# Altium PCB lock_in_amplifier.PcbDoc
Units mil, origin at the board's own origin, x right, y up, seen from the top; angles counter-clockwise.
Board outline 2205 x 2223 mil, 2 copper layers (Top Layer, Bottom Layer); 50 components, 36 nets, 177 pads, 217 vias.
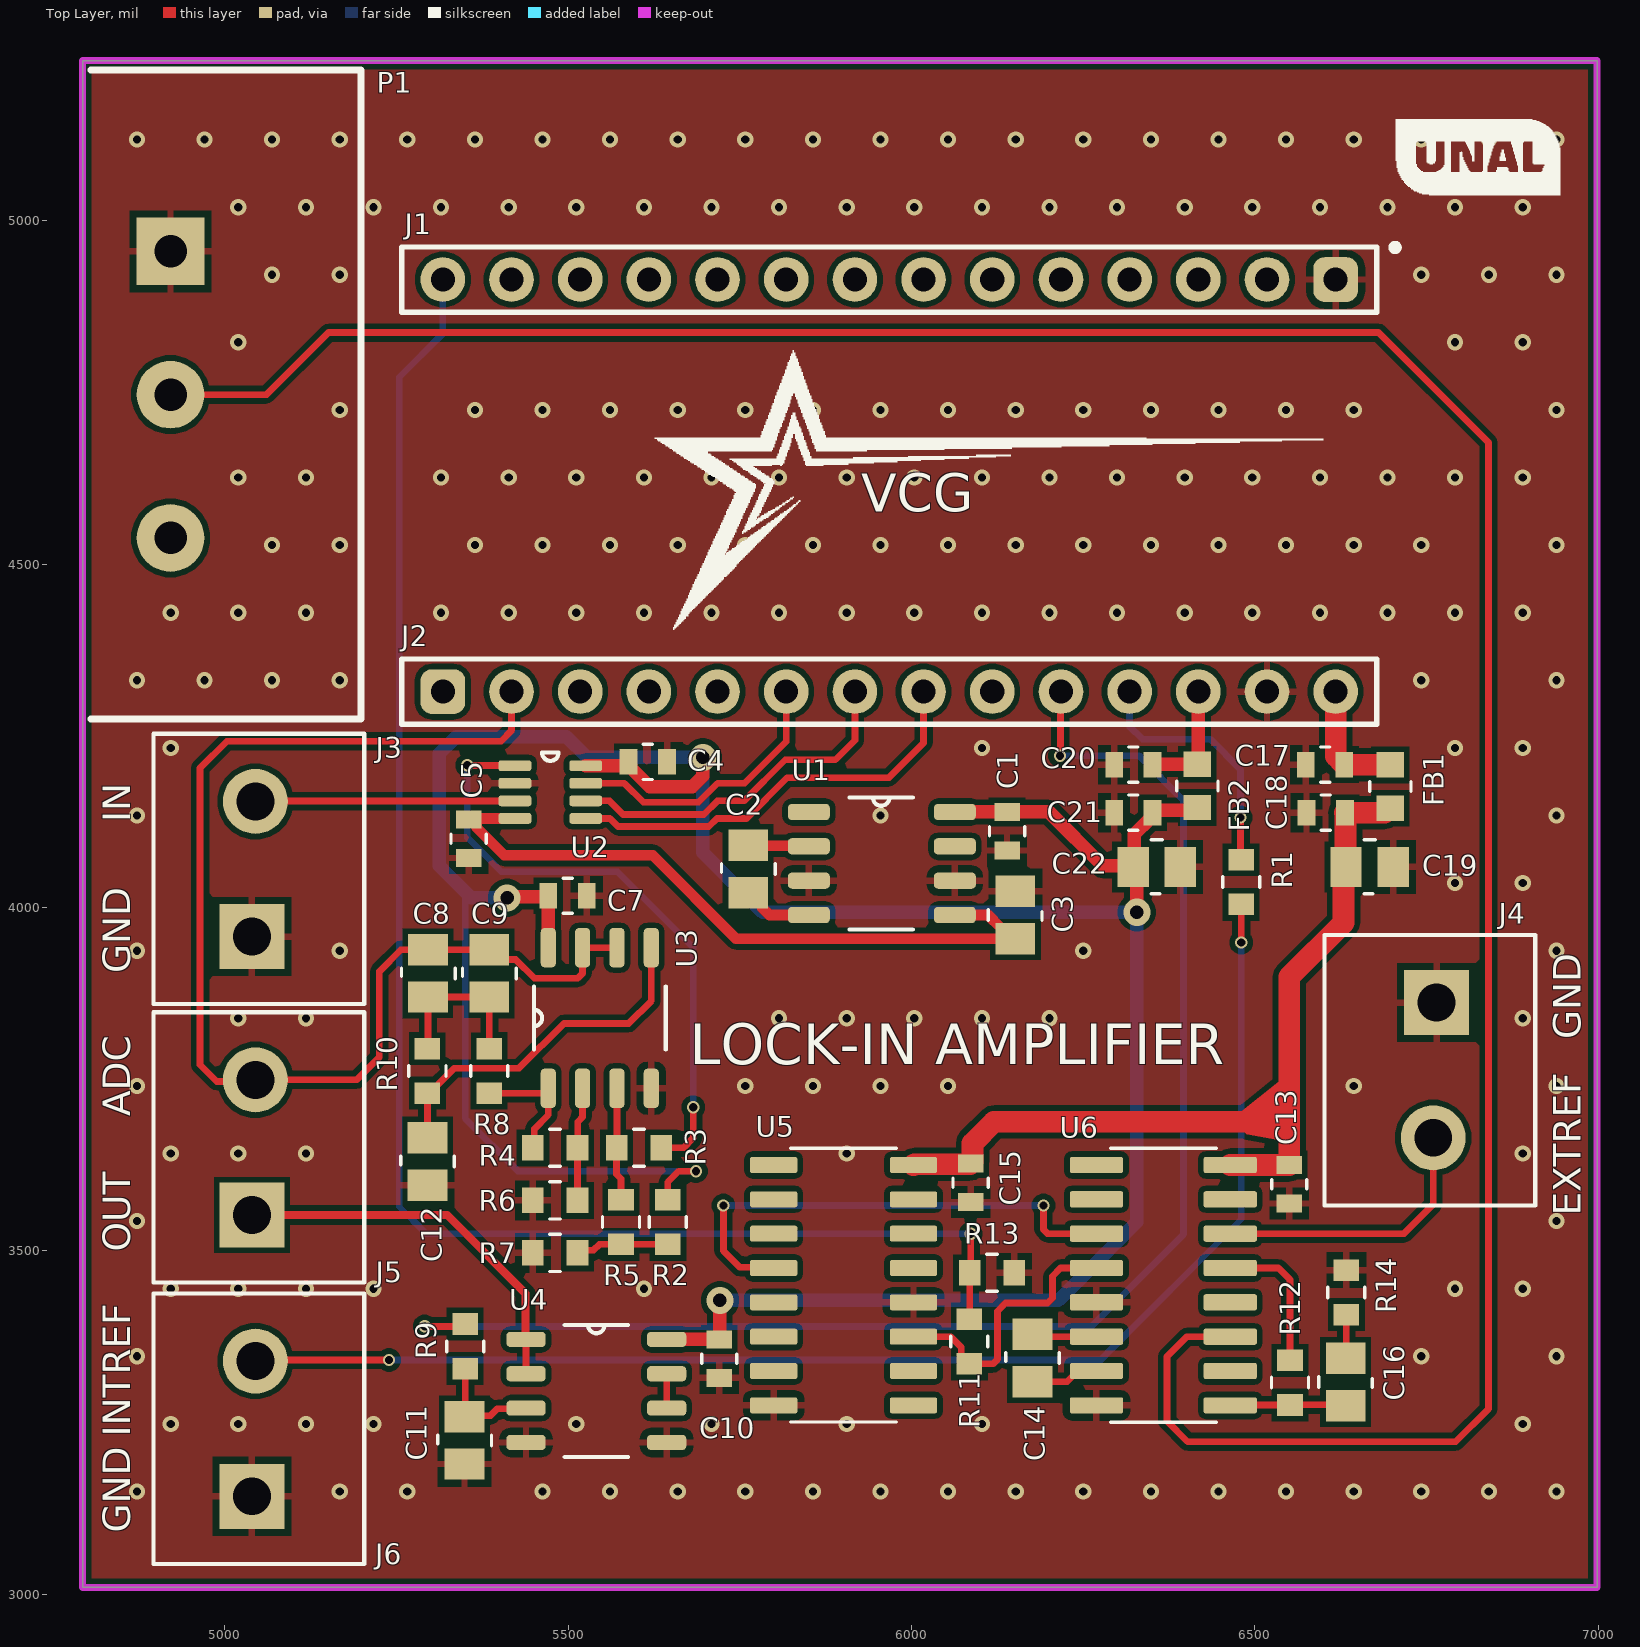
[diagram p0: Top Layer view]
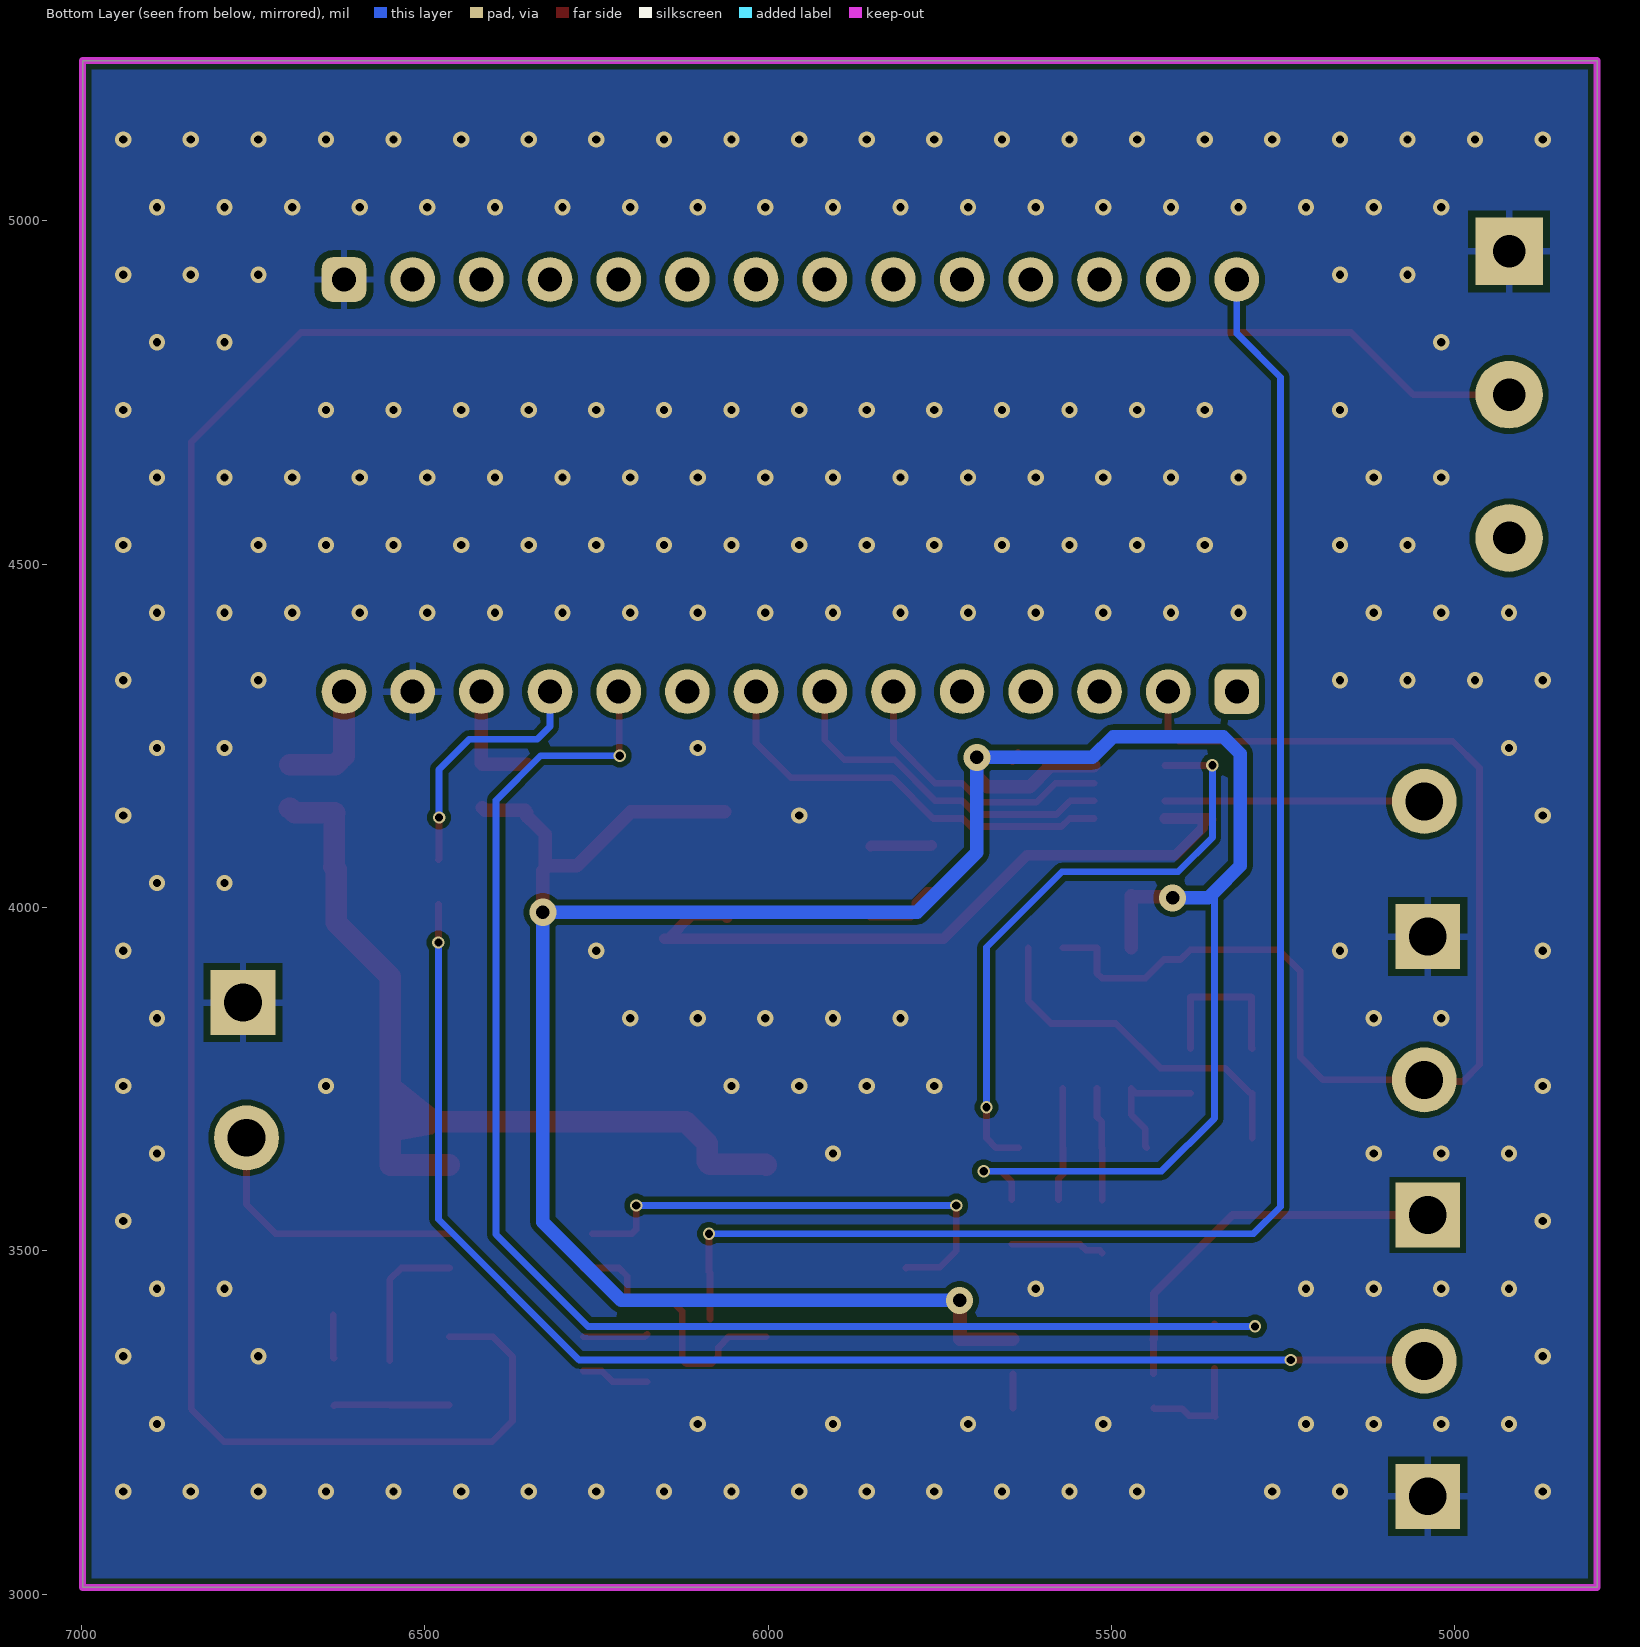
[diagram p1: Bottom Layer view, seen from below]
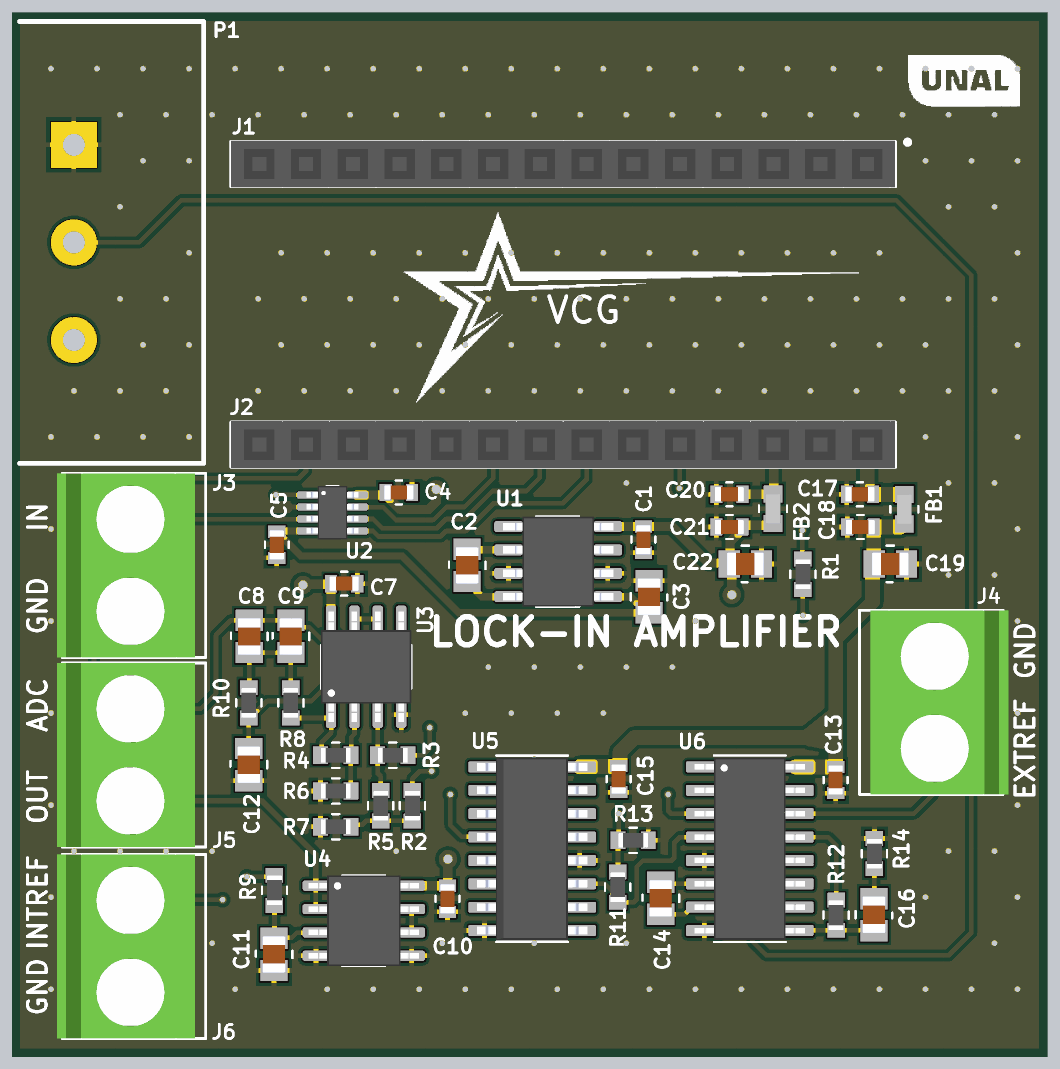
[diagram p2: 3D render of the assembled board from above, using the file's embedded part models]

## Layer stack, top to bottom
Top Solder: solder mask 0.4, Solder Resist, Dk 3.5
Top Layer: signal copper 1.4
Dielectric 1: dielectric 12.6, FR-4, Dk 4.8
Bottom Layer: signal copper 1.4
Bottom Solder: solder mask 0.4, Solder Resist, Dk 3.5

## Board outline
4793,3010 4793,5233 6998,5233 6998,3010

## Design rules (kind name [scope] priority, off if disabled: settings)
AcuteAngle [All] p1: minimum=6.00000000000000E+0001 checktracksonly=FALSE
Clearance [All] p1: gap=7.87 ignorepadtopadclearanceinfootprint=FALSE
HoleSize [All] p1: absolutevalues=TRUE maxlimit=100 minlimit=12 maxpercent=80.000 minpercent=20.000
MinimumSolderMaskSliver [All] p1: minsoldermaskwidth=4.72
PolygonConnect via [isvia] p1: connectstyle=Direct reliefconductorwidth=10 reliefentries=4 polygonreliefangle="90 Angle" airgapwidth=10
PolygonConnect [All] p2: connectstyle=Relief reliefconductorwidth=10 reliefentries=4 polygonreliefangle="90 Angle" airgapwidth=10
RoutingVias [All] p1: holewidth=12 width=18 viastyle="Through Hole" minholewidth=11.81 minwidth=18 maxholewidth=19.68 maxwidth=39.37
SilkToSolderMaskClearance [IsPad] p1: minsilkscreentomaskgap=5.91 clearancetoexposedcopper=TRUE
SolderMaskExpansion [All] p1: expansion=2 istentingtop=FALSE
SupplyNets "Schematic Supply Nets_4" [InNet('3V3')] p1: voltage=0.000
SupplyNets "Schematic Supply Nets_3" [InNet('5V_USB')] p2: voltage=0.000
SupplyNets "Schematic Supply Nets_2" [InNet('GND')] p3: voltage=0.000
SupplyNets "Schematic Supply Nets_1" [InNet('3V3TEENSY')] p4: voltage=0.000
SupplyNets "Schematic Supply Nets" [InNet('5V')] p5: voltage=0.000
Width [All] p1: maxlimit=39.37 minlimit=7.87 preferedwidth=9.84
27 further rules are at their usual default settings.

## Classes and differential pairs
component class POWER: C17 C18 C19 C20 C21 C22 FB1 FB2 J3 J4 J5 J6
component class MAIN: C1 C2 C3 C4 C5 C7 C8 C9 C10 C11 C12 C13 C14 C15 C16 J1 J2 P1 R1 R2 R3 R4 R5 R6 R7 R8 R9 R10 R11 R12 R13 R14 U1 U2 U3 U4 U5 U6

## Components (designator, comment, footprint, x,y, rotation, side; value= is the part's Value field where it differs from the comment)
C1 "CAP_100nF_50V" CAP_0603 6139,4111 r90 top value=0.1uF
C2 "CAP_10uF_16V" CAP_0805 5762,4056 r90 top value=10uF
C3 "CAP_10uF_16V" CAP_0805 6151,3989 r270 top value=10uF
C4 "CAP_100nF_50V" CAP_0603 5616,4212 r180 top value=0.1uF
C5 "CAP_100nF_50V" CAP_0603 5355,4100 r90 top value=0.1uF
C7 "CAP_100nF_50V" CAP_0603 5499,4017 r180 top value=0.1uF
C8 "CAP_100pF_25V" CAP_0805 5296,3904 r90 top value=100pF
C9 "CAP_100pF_25V" CAP_0805 5385,3904 r90 top value=100pF
C10 "CAP_100nF_50V" CAP_0603 5720,3343 r90 top value=0.1uF
C11 "CAP_10uF_16V" CAP_0805 5349,3224 r90 top value=10uF
C12 "CAP_100pF_25V" CAP_0805 5295,3630 r90 top value=100pF
C13 "CAP_100nF_50V" CAP_0603 6550,3597 r90 top value=0.1uF
C14 "CAP_820pF_25V" CAP_0805 6176,3344 r90 top value=820pF
C15 "CAP_100nF_50V" CAP_0603 6086,3599 r90 top value=0.1uF
C16 "CAP_1.5uF_16V" CAP_0805 6632,3309 r270 top value=1.5uF
C17 "CAP_100nF_50V" CAP_0603 6602,4208 r0 top value=0.1uF
C18 "CAP_100nF_50V" CAP_0603 6603,4138 r0 top value=0.1uF
C19 "CAP_10uF_16V" CAP_0805 6667,4059 r180 top value=10uF
C20 "CAP_100nF_50V" CAP_0603 6323,4208 r0 top value=0.1uF
C21 "CAP_100nF_50V" CAP_0603 6323,4138 r0 top value=0.1uF
C22 "CAP_10uF_16V" CAP_0805 6357,4059 r180 top value=10uF
FB1 "FB_60_0603_2A" 0603_FB 6697,4176 r270 top value="60 OHM"
FB2 "FB_60_0603_2A" 0603_FB 6416,4177 r270 top value="60 OHM"
J1 "SSW-114-01-X-S" SAMTEC_SSW-114-01-X-S 5967.47,4914.26 r180 top locked
J2 "SSW-114-01-X-S" SAMTEC_SSW-114-01-X-S 5967.47,4314.26 r0 top locked
J3 "CON_2x1_TH_5mm" CON_2x1_TH_5MM#1 5042,4056 r90 top
J4 "CON_2x1_TH_5mm" CON_2x1_TH_5MM#2 6762,3763 r270 top
J5 "CON_2x1_TH_5mm" CON_2x1_TH_5MM#2 5042,3650.57 r90 top
J6 "CON_2x1_TH_5mm" CON_2x1_TH_5MM#1 5042,3241 r90 top
P1 "POT_200K" POT_PDB181-K420K-204B 4921,4746.66 r270 top value=200K
R1 "RES_191R_0603" RES_0603 6480,4037 r90 top value=191R
R2 "RES_10K_0603" RES_0603 5645,3542 r90 top value=10K
R3 "RES_100K_0603" RES_0603 5603,3650 r180 top value=100K
R4 "RES_100K_0603" RES_0603 5481,3650 r180 top value=100K
R5 "RES_100K_0603" RES_0603 5577,3542 r270 top value=100K
R6 "RES_100K_0603" RES_0603 5481,3573.5 r0 top value=100K
R7 "RES_10K_0603" RES_0603 5481,3497 r0 top value=10K
R8 "RES_12K_0603" RES_0603 5385,3762 r90 top value=12K
R9 "RES_10K_0603" RES_0603 5350,3361 r270 top value=10K
R10 "RES_12K_0603" RES_0603 5295,3762 r90 top value=12K
R11 "RES_2K2_0603" RES_0603 6084,3368 r270 top value=2K2
R12 "RES_220K_0603" RES_0603 6551,3308 r90 top value=220K
R13 "RES_3K3_0603" RES_0603 6117,3468 r180 top value=3K3
R14 "RES_4K7_0603" RES_0603 6633,3439.48 r270 top value=4K7
U1 "IC_TC7660" IC_TC7660EOA 5956.7,4064 r0 top
U2 "IC_LTC6910-2" IC_LTC6910-2CTS8#TRMPBF 5474,4168 r0 top
U3 "IC_MCP602" IC_MCP602T-I/SN 5546,3839 r90 top
U4 "IC_MCP602" IC_MCP602T-I/SN 5541,3296 r0 top
U5 "IC_74HC4060D" IC_74HC4060D-Q100,118 5901,3450 r0 top
U6 "IC_CD74HC4046AM96" IC_CD74HC4046AM96 6366.56,3450 r0 top

## Footprints (in the part's own frame and the unit in brackets; to place one, negate y for a bottom-side part, rotate by r counter-clockwise, add the part's x,y. Pads: shape width x height; smd on the part's side, far side on the other; paste and mask are expansions set on the pad)
0603_FB [mil]
  rect 37x40 smd mask+4: 1(-31.5,0) 2(31.5,0)
  silkscreen extent -7,-30 7,30, body extent -32,-16 31,16, height 32
CAP_0603 [mil]
  rect 26x37 smd paste+0 mask+3.94: 1(-28,0) 2(28,0)
  silkscreen extent -7,-26 7,26, body extent -31,-16 31,16, height 34
CAP_0805 [mm]
  rect 1.16x1.47 smd paste+0 mask+0.1: 1(-0.875,0) 2(0.875,0)
  silkscreen extent -0.2,-1 0.2,0.99, body extent -1,-0.63 1,0.63, height 0.88
CON_2x1_TH_5MM#1 [mm]
  round 2.4 hole 1.4: 1(2.5,-0.063)
  rect 2.4x2.4 hole 1.4: 2(-2.5,0.063)
  silkscreen extent -5,-4.09 5,3.71, body extent -5,-3.5 5,4, height 11.5
CON_2x1_TH_5MM#2 [mm]
  rect 2.4x2.4 hole 1.4: 1(-2.5,0.063)
  round 2.4 hole 1.4: 2(2.5,-0.063)
  silkscreen extent -5,-4.09 5,3.71, body extent -5,-3.5 5,4, height 11.5
IC_74HC4060D-Q100,118 [mm]
  rrect25% 1.75x0.59 smd mask+0.1: 1(-2.585,4.445) 2(-2.585,3.175) 3(-2.585,1.905) 4(-2.585,0.635) 5(-2.585,-0.635) 6(-2.585,-1.905) 7(-2.585,-3.175) 8(-2.585,-4.445) 9(2.585,-4.445) 10(2.585,-3.175) 11(2.585,-1.905) 12(2.585,-0.635) 13(2.585,0.635) 14(2.585,1.905) 15(2.585,3.175) 16(2.585,4.445)
  silkscreen extent -1.95,-5.06 1.95,5.06, body extent -3,-4.95 3,4.95, height 1.75
IC_CD74HC4046AM96 [mm]
  rrect25% 1.97x0.6 smd mask+0.1: 1(-2.475,4.445) 2(-2.475,3.175) 3(-2.475,1.905) 4(-2.475,0.635) 5(-2.475,-0.635) 6(-2.475,-1.905) 7(-2.475,-3.175) 8(-2.475,-4.445) 9(2.475,-4.445) 10(2.475,-3.175) 11(2.475,-1.905) 12(2.475,-0.635) 13(2.475,0.635) 14(2.475,1.905) 15(2.475,3.175) 16(2.475,4.445)
  silkscreen extent -1.95,-5.06 1.95,5.06, body extent -3,-4.95 3,4.95, height 1.75
IC_LTC6910-2CTS8#TRMPBF [mm]
  rrect50% 1.219x0.4 smd mask+0.05: 1(-1.31,0.975) 2(-1.31,0.325) 3(-1.31,-0.325) 4(-1.31,-0.975) 5(1.31,-0.975) 6(1.31,-0.325) 7(1.31,0.325) 8(1.31,0.975)
  silkscreen extent -0.3,1.15 0.3,1.46, body extent -1.4,-1.44 1.4,1.46, height 1
IC_MCP602T-I/SN [mm]
  rrect50% 1.45x0.559 smd mask+0.1: 1(-2.6,1.905) 2(-2.6,0.635) 3(-2.6,-0.635) 4(-2.6,-1.905) 5(2.6,-1.905) 6(2.6,-0.635) 7(2.6,0.635) 8(2.6,1.905)
  silkscreen extent -1.17,-2.44 1.17,2.44, body extent -3,-2.46 3,2.46, height 1.75
IC_TC7660EOA [mm]
  rrect50% 1.55x0.6 smd mask+0.1: 1(-2.7,1.905) 2(-2.7,0.635) 3(-2.7,-0.635) 4(-2.7,-1.905) 5(2.7,-1.905) 6(2.7,-0.635) 7(2.7,0.635) 8(2.7,1.905)
  silkscreen extent -1.19,-2.44 1.14,2.44, body extent -3,-2.45 3,2.45, height 1.75
POT_PDB181-K420K-204B [mm]
  rect 2.5x2.5 / inner round 2.5 / far side rect 2.5x2.5 hole 1.2: 1(-5.3,0)
  round 2.5 hole 1.2: 2(0,0) 3(5.3,0)
  silkscreen extent -12,-2.95 12,7.05
RES_0603 [mm]
  rect 0.8x0.95 smd mask+0.1: 1(-0.825,0) 2(0.825,0)
  silkscreen extent -0.2,-0.69 0.2,0.69, body extent -0.8,-0.4 0.8,0.4, height 0.55
SAMTEC_SSW-114-01-X-S [mil]
  rrect50% 65x65 hole 35: 1(-650,0)
  round 65 hole 35: 2(-550,0) 3(-450,0) 4(-350,0) 5(-250,0) 6(-150,0) 7(-50,0) 8(50,0) 9(150,0) 10(250,0) 11(350,0) 12(450,0) 13(550,0) 14(650,0)
  silkscreen extent -710,-47 710,47, body extent -710,-50 710,50, height 335

## Part data
C1 C4 C5 C7 C10 C13 C15 C17 C18 C20 C21: "50V 100nF Y5V -20%~+80% 0603", Manufacturer="Walsin Tech Corp", Manufacturer PN=0603F104Z500CT, ComponentLink1Description=LCSC, ComponentLink1URL=https://www.lcsc.com/product-detail/Multilayer-Ceramic-Capacitors-MLCC-SMD-SMT_Walsin-Tech-Corp-0603F104Z500CT_C83060.html, Supplier 1=LCSC
C2 C3 C11 C19 C22: "CAP CER 10UF 25V X5R 0805 ±10%", Manufacturer="Samsung Electro-Mechanics", Manufacturer PN=CL21A106KAYNNNE, ComponentLink2Description=LCSC, ComponentLink2URL=https://lcsc.com/product-detail/Multilayer-Ceramic-Capacitors-MLCC-SMD-SMT_Samsung-Electro-Mechanics-CL21A106KAYNNNE_C15850.html, Supplier 1=LCSC
C8 C9 C12: "CAP CER 100PF 25V C0G/NP0 0805 ±5%", Manufacturer=KEMET, Manufacturer PN=C0805C101J3GACTU, ComponentLink1Description=Digi-key, ComponentLink1URL=https://www.digikey.com/en/products/detail/kemet/C0805C101J3GACTU/2211639, Supplier 1=Digi-key
C14: "CAP CER 820PF 16V C0G/NP0 0805 ±5%", Manufacturer="Vishay Vitramon", Manufacturer PN=VJ0805D821JXJQJHT, ComponentLink1Description=Digi-key, ComponentLink1URL=https://www.digikey.com/en/products/detail/vishay-vitramon/VJ0805D821JXJQJHT/14292859, Supplier 1=Digi-key
C16: "CAP CER 0805 1.5UF 16V X7R 5%", Manufacturer=KEMET, Manufacturer PN=C0805C155J4REC7210, ComponentLink1Description=Digi-key, ComponentLink1URL=https://www.digikey.com/en/products/detail/kemet/C0805C155J4REC7210/8645141, Supplier 1=Digi-key
FB1 FB2: "2A 1 100mΩ 60Ω@100MHz ±25% 0603 Ferrite Beads ROHS", Manufacturer=TAI-TECH, Manufacturer PN=HCB1608KF-600T20, ComponentLink1Description=LCSC, ComponentLink1URL=https://www.lcsc.com/product-detail/Ferrite-Beads_TAI-TECH-HCB1608KF-600T20_C369516.html, Supplier 1=LCSC
J1 J2: "14 Position Receptacle Connector 0.100 (2.54mm) Through Hole Gold", Manufacturer="Samtec Inc.", Manufacturer PN=SSW-114-01-G-S, ComponentLink1Description=Digi-key, ComponentLink1URL=https://www.digikey.com/es/products/category/conectores-rectangulares/2027?s=N4IgTCBcDaIMpwOoFoCMqAsyAMrkHFk4QBdAXyA, Supplier 1=Digi-key
J3 J4 J5 J6: "2POS 5MM", Manufacturer=JILN, Manufacturer PN=JL126-50002G01, ComponentLink1Description=LCSC, ComponentLink1URL=https://www.lcsc.com/product-detail/Screw-terminal_JILN-JL126-50002G01_C394556.html, Supplier 1=LCSC
P1: "POT 200K OHM 1/5W CARBON LINEAR", Manufacturer="Bourns Inc.", Manufacturer PN=PDB181-K420K-204B, ComponentLink1Description=Digi-key, ComponentLink1URL=https://www.digikey.com/en/products/detail/bourns-inc/PDB181-K420K-204B/2564754, Supplier 1=Digi-key
R1: "100mW Thick Film Resistor 75V ±1% 191Ω 0603 Chip Resistor - Surface Mount ROHS", Manufacturer=FOJAN, Manufacturer PN=FRC0603F1910TS, ComponentLink1Description=LCSC, ComponentLink1URL=https://lcsc.com/product-detail/Chip-Resistor-Surface-Mount_FOJAN-FRC0603F1910TS_C3000718.html, Supplier 1=LCSC
R2 R7 R9: "RES 10K OHM 1% 1/10W 0603", Manufacturer=YAGEO, Manufacturer PN=RC0603FR-0710KL, ComponentLink1Description=Digi-key, ComponentLink1URL=https://www.digikey.com/en/products/detail/yageo/RC0603FR-0710KL/726880?s=N4IgTCBcDaIEoGEAMA2JBmAYnAtEg7AIxIDSAMiALoC%2BQA, Supplier 1=Digi-key
R3 R4 R5 R6: "RES 100K OHM 1% 1/10W 0603", Manufacturer=YAGEO, Manufacturer PN=RC0603FR-07100KL, ComponentLink1Description=Digi-key, ComponentLink1URL=https://www.digikey.com/en/products/detail/yageo/RC0603FR-07100KL/726889?s=N4IgTCBcDaIEoGEAMA2JBmAYnAtEg7AIxJIDSAMiALoC%2BQA, Supplier 1=Digi-key
R8 R10: "RES 12K OHM 1% 1/10W 0603", Manufacturer=YAGEO, Manufacturer PN=RC0603FR-0712KL, ComponentLink1Description=Digi-key, ComponentLink1URL=https://www.digikey.com/en/products/detail/yageo/RC0603FR-0712KL/726913?s=N4IgTCBcDaIEoGEAMA2JBmAYnAtEg7AIxgDSAMiALoC%2BQA, Supplier 1=Digi-key
R11: "RES 2.2K OHM 1% 1/10W 0603", Manufacturer=YAGEO, Manufacturer PN=RC0603FR-072K2L, ComponentLink1Description=Digi-key, ComponentLink1URL=https://www.digikey.com/en/products/detail/yageo/RC0603FR-072K2L/727016?s=N4IgTCBcDaIEoGEAMA2JBmAYnAtEg7GANJgAyIAugL5A, Supplier 1=Digi-key
R12: "RES 220K OHM 1% 1/10W 0603", Manufacturer=YAGEO, Manufacturer PN=RC0603FR-07220KL, ComponentLink1Description=Digi-key, ComponentLink1URL=https://www.digikey.com/en/products/detail/yageo/RC0603FR-07220KL/727062?s=N4IgTCBcDaIEoGEAMA2JBmAYnAtEg7GGEgNIAyIAugL5A, Supplier 1=Digi-key
R13: "RES 3.3K OHM 5% 1/10W 0603", Manufacturer=FOJAN, Manufacturer PN="FRC0603J332 TS", ComponentLink1Description=LCSC, ComponentLink1URL=https://www.lcsc.com/product-detail/Chip-Resistor-Surface-Mount_FOJAN-FRC0603J332-TS_C2907140.html, Supplier 1=LCSC
R14: "RES 4.7K OHM 1% 1/10W 0603", Manufacturer=VO, Manufacturer PN=SCR0603F4K7, ComponentLink1Description=LCSC, ComponentLink1URL=https://lcsc.com/product-detail/Chip-Resistor-Surface-Mount_VO-SCR0603F4K7_C3016318.html, Supplier 1=LCSC
U1: "Charge Pump Switching Regulator IC Positive or Negative Fixed -Vin, 2Vin 1 Output 20mA 8-SOIC", Manufacturer="Microchip Technology", Manufacturer PN=TC7660EOA, ComponentLink1Description=Digi-key, ComponentLink1URL=https://www.digikey.com/en/products/detail/microchip-technology/TC7660EOA/418700?s=N4IgTCBcDaICoGEDsA2FAGAogeQIIFoA5AERAF0BfIA, Supplier 1=Digi-key
U2: "Programmable Gain Amplifier 1 Circuit Rail-to-Rail TSOT-23-8", Manufacturer="Analog Devices Inc.", Manufacturer PN=LTC6910-2CTS8#TRMPBF, ComponentLink1Description=Digi-key, ComponentLink1URL=https://www.digikey.com/en/products/detail/analog-devices-inc/LTC6910-2CTS8-TRMPBF/1115904?s=N4IgTCBcDaIDIBUDCA2AnARgAwFoxIQGUAOAYgQCUBZABQCEAxEAXQF8g, Supplier 1=Digi-key
U3 U4: "IC CMOS 2 CIRCUIT 8SOIC OP-AMP", Manufacturer="Microchip Technology", Manufacturer PN=MCP602T-I/SN, ComponentLink1Description=Digi-key, ComponentLink1URL=https://www.digikey.com/en/products/detail/microchip-technology/MCP602T-I-SN/319452?s=N4IgTCBcDaILIGEAKA2ADGAKgWgJIHoBlAORAF0BfIA, Supplier 1=Digi-key
U5: "Counter IC Binary Counter 1 Element 14 Bit Negative Edge 16-SO", Manufacturer="Nexperia USA Inc.", Manufacturer PN=74HC4060D-Q100,118, ComponentLink1Description=Digi-key, ComponentLink1URL=https://www.digikey.com/en/products/detail/nexperia-usa-inc/74HC4060D-Q100-118/3678893?s=N4IgTCBcDaIOwBYASBhBAGAbOgIgWgEUBGddAGiKIA4QBdAXyA, Supplier 1=Digi-key
U6: "Phase Lock Loop (PLL) IC 38MHz 1 16-SOIC", Manufacturer="Texas Instruments", Manufacturer PN=CD74HC4046AM96, ComponentLink1Description=Digi-key, ComponentLink1URL=https://www.digikey.com/en/products/detail/texas-instruments/CD74HC4046AM96/555594, Supplier 1=Digi-key

## Via types
v1: diameter 23.62, hole 12, Top Layer to Bottom Layer, tented both sides, 202 vias
v2: diameter 18, hole 12, Top Layer to Bottom Layer, tented both sides, 11 vias
v3: diameter 39.37, hole 19.68, Top Layer to Bottom Layer, tented both sides, 4 vias

## Nets (pads, with @x,y where several pads share a name; then routed paths per layer and width w, separated by ;. In a path a pad name is that pad's centre, name@x,y a point inside that pad or via, vN(x,y) a via of type N, cw(c..) or ccw(c..) an arc to the next point about the centre after c; other vN are vias at no path point)
3V3: C1.2 C4.2 C7.2 C10.2 C21.2 C22.2 FB2.2 R2.2 U1.8 U2.8 U3.8 U4.8 | length 4380.7
  Top Layer w9.84: R2.2 5645,3600 5661,3616 v2(5686,3616)
  Top Layer w19.68: v3(5411,4014) 5412.5,4015.5 5469.5,4015.5 C7.2 U3.8 ; U2.8 5584.84,4206.39 5588,4209.55 C4.2 ; C4.2@5589.19,4208.36 5591.16,4206.39 5591.16,4203.34 5618.72,4175.78 5680.63,4175.78 5696,4191.15 v3(5696,4218.59) ; U4.8 C10.2 5720.5,3371.5 5720.5,3427.3 v3(5721,3427.8) ; U1.8 C1.2 6200,4139 6278.21,4060.79 C22.2@6324.34,4060.79 ; v3(6328,3993) 6328,4053.55 C22.2 C22.2@6324.34,4060.79 ; C21.2 6351,4132.5 6347.84,4129.34 6347.07,4129.34 6324.34,4106.6 C22.2@6324.34,4060.79 ; C21.2@6353.25,4141.75 6412.25,4141.75 FB2.2
  Bottom Layer w9.84: 5350,4023 5350,3693 5427,3616 v2(5686,3616)
  Bottom Layer w19.68: v3(5411,4014) 5359,4014 5350,4023 5312.28,4060.72 5312.28,4223.69 5337.31,4248.72 5497.49,4248.72 5527.62,4218.59 v3(5696,4218.59) ; v3@5695.71,4218.29 5696,4218 5696,4080 5783,3993 v3(6328,3993) 6328,3542 6213.8,3427.8 v3(5721,3427.8)
3V3TEENSY: C20.2 FB2.1 J2.12 | length 163.5
  Top Layer w19.68: C20.2 6351.25,4208.25 6415.75,4208.25 FB2.1 ; FB2.1@6417.47,4209.97 J2.12@6417.47,4308.26
5V: C13.2 C15.2 C18.2 C19.2 FB1.2 U5.16 U6.16 | length 1297.5
  Top Layer w31.5: U5.16 6003.77,3626 6085,3626 C15.2 6088.75,3629.75 6088.75,3656.75 6120,3688 6536,3688 6550,3702 ; U6.16 C13.2 6550,3899 6628.98,3977.98 6628.98,4055.43 C19.2 6631.78,4059.78 6631.78,4137.22 C18.2 6689,4138 6695.5,4144.5 FB1.2
5V_USB: C17.2 FB1.1 J2.14 | length 172.2
  Top Layer w31.5: C17.2@6617.47,4220.53 6627.25,4210.75 C17.2 6630.25,4207.75 6696.25,4207.75 FB1.1@6696.5,4208 ; 6617.47,4226.53 J2.14
AFTERSUM: R4.2 R8.1 U3.1 | length 185.5
  Top Layer w9.84: R8.1 5464.97,3729.52 5471,3735.55 U3.1 5471,3698 5450.7,3677.7 5450.7,3652.18 R4.2
AFTPREAMP: R3.1 U2.1 | length 899.7
  Top Layer w9.84: v2(5353,4207) 5353.31,4206.69 5421.78,4206.69 U2.1@5421.95,4206.87 ; R3.1 5668,3650 5682,3664 v2(5682,3709)
  Bottom Layer w9.84: v2(5353,4207) 5353,4102 5403,4052 5572,4052 5682,3942 v2(5682,3709)
AMP0: J2.8 U2.5 | length 616
  Top Layer w9.84: U2.5 5560.68,4129.61 5572.58,4117.71 5704.69,4117.71 5716.59,4129.61 5759.61,4129.61 5819,4189 5967,4189 6017.47,4239.47 J2.8@6017.47,4308.26
AMP1: J2.7 U2.6 | length 509.6
  Top Layer w9.84: U2.6 5560.14,4155.2 5579.92,4135.43 5697.35,4135.43 5717.12,4155.2 5756.26,4155.2 5816.05,4215 5889,4215 5917.47,4243.47 J2.7@5917.47,4308.26
AMP2: J2.6 U2.7 | length 406.7
  Top Layer w9.84: U2.7 5525.66,4180.7 5581.78,4180.7 5609.34,4153.15 5690.01,4153.15 5717.66,4180.79 5756.79,4180.79 5817.47,4241.47 J2.6@5817.47,4308.26
C1A: C14.2 U6.6 | length 94.5
  Top Layer w9.84: C14.2 6179.45,3375 U6.6
C1B: C14.1 U6.7 | length 99.5
  Top Layer w9.84: C14.1 6226.7,3309.55 6242.15,3325 U6.7
CAP+: C2.2 U1.2 | length 89
  Top Layer w15.75: C2.2 5762.72,4089.72 5849.68,4089.72 U1.2
CAP-: C2.1 U1.4 | length 106.4
  Top Layer w15.75: C2.1 5768.1,4021.55 5783.06,4006.59 5783.06,3998.94 5793,3989 U1.4
GND: C1.1 C3.1 C4.1 C5.1 C7.1 C10.1 C11.1 C12.1 C13.1 C15.1 C17.1 C18.1 C19.1 C20.1 C21.1 C22.1 J1.1 J2.13 J3.2 J4.1 J6.2 P1.1 R6.1 R7.1 R13.1 R14.1 U1.3 U1.6 U2.2 U3.4 U4.4 U4.5 U5.8 U5.12 U6.5 U6.8 | length 16.9
  Top Layer w9.84: C4.1@5635.92,4225.58 5644,4217.5 C4.1
  other v1: 4872.05,3149.61 5167.32,3149.61 5265.75,3149.61 5462.6,3149.61 5561.02,3149.61 5659.45,3149.61 5757.87,3149.61 5856.3,3149.61 5954.72,3149.61 6053.15,3149.61 6151.57,3149.61 6250,3149.61 6348.43,3149.61 6446.85,3149.61 6545.28,3149.61 6643.7,3149.61 6742.13,3149.61 6840.55,3149.61 6938.98,3149.61 4921.26,3248.03 5019.69,3248.03 5118.11,3248.03 5216.54,3248.03 5511.81,3248.03 5708.66,3248.03 5905.51,3248.03 6102.36,3248.03 6889.76,3248.03 4872.05,3346.46 6742.13,3346.46 6938.98,3346.46 4921.26,3444.88 5019.69,3444.88 5118.11,3444.88 5216.54,3444.88 5610.24,3444.88 6791.34,3444.88 6889.76,3444.88 4872.05,3543.31 6938.98,3543.31 4921.26,3641.73 5019.69,3641.73 5118.11,3641.73 5905.51,3641.73 6889.76,3641.73 4872.05,3740.16 5757.87,3740.16 5856.3,3740.16 5954.72,3740.16 6053.15,3740.16 6643.7,3740.16 6938.98,3740.16 5019.69,3838.58 5118.11,3838.58 5807.09,3838.58 5905.51,3838.58 6003.94,3838.58 6102.36,3838.58 6200.79,3838.58 6889.76,3838.58 4872.05,3937.01 5167.32,3937.01 6250,3937.01 6938.98,3937.01 6791.34,4035.43 6889.76,4035.43 4872.05,4133.86 5954.72,4133.86 6938.98,4133.86 4921.26,4232.28 6102.36,4232.28 6791.34,4232.28 6889.76,4232.28 4872.05,4330.71 4970.47,4330.71 5068.9,4330.71 5167.32,4330.71 6742.13,4330.71 6938.98,4330.71 4921.26,4429.13 5019.69,4429.13 5118.11,4429.13 5314.96,4429.13 5413.39,4429.13 5511.81,4429.13 5610.24,4429.13 5708.66,4429.13 5807.09,4429.13 5905.51,4429.13 6003.94,4429.13 6102.36,4429.13 6200.79,4429.13 6299.21,4429.13 6397.64,4429.13 6496.06,4429.13 6594.49,4429.13 6692.91,4429.13 6791.34,4429.13 6889.76,4429.13 5068.9,4527.56 5167.32,4527.56 5364.17,4527.56 5462.6,4527.56 5561.02,4527.56 5659.45,4527.56 5757.87,4527.56 5856.3,4527.56 5954.72,4527.56 6053.15,4527.56 6151.57,4527.56 6250,4527.56 6348.43,4527.56 6446.85,4527.56 6545.28,4527.56 6643.7,4527.56 6742.13,4527.56 6938.98,4527.56 5019.69,4625.98 5118.11,4625.98 5314.96,4625.98 5413.39,4625.98 5511.81,4625.98 5610.24,4625.98 5708.66,4625.98 5807.09,4625.98 5905.51,4625.98 6003.94,4625.98 6102.36,4625.98 6200.79,4625.98 6299.21,4625.98 6397.64,4625.98 6496.06,4625.98 6594.49,4625.98 6692.91,4625.98 6791.34,4625.98 6889.76,4625.98 5167.32,4724.41 5364.17,4724.41 5462.6,4724.41 5561.02,4724.41 5659.45,4724.41 5757.87,4724.41 5856.3,4724.41 5954.72,4724.41 6053.15,4724.41 6151.57,4724.41 6250,4724.41 6348.43,4724.41 6446.85,4724.41 6545.28,4724.41 6643.7,4724.41 6938.98,4724.41 5019.69,4822.83 6791.34,4822.83 6889.76,4822.83 5068.9,4921.26 5167.32,4921.26 6742.13,4921.26 6840.55,4921.26 6938.98,4921.26 5019.69,5019.69 5118.11,5019.69 5216.54,5019.69 5314.96,5019.69 5413.39,5019.69 5511.81,5019.69 5610.24,5019.69 5708.66,5019.69 5807.09,5019.69 5905.51,5019.69 6003.94,5019.69 6102.36,5019.69 6200.79,5019.69 6299.21,5019.69 6397.64,5019.69 6496.06,5019.69 6594.49,5019.69 6692.91,5019.69 6791.34,5019.69 6889.76,5019.69 4872.05,5118.11 4970.47,5118.11 5068.9,5118.11 5167.32,5118.11 5265.75,5118.11 5364.17,5118.11 5462.6,5118.11 5561.02,5118.11 5659.45,5118.11 5757.87,5118.11 5856.3,5118.11 5954.72,5118.11 6053.15,5118.11 6151.57,5118.11 6250,5118.11 6348.43,5118.11 6446.85,5118.11 6545.28,5118.11 6643.7,5118.11 6742.13,5118.11 6840.55,5118.11 6938.98,5118.11
NetC8_1: C8.1 C9.1 R8.2 R10.2 | length 239.6
  Top Layer w9.84: R10.2 5296,3795.48 C8.1 C9.1 R8.2
NetC11_2: C11.2 R9.2 U4.3 | length 163.8
  Top Layer w9.84: C11.2 C11.2@5350,3259.45 ; R9.2 C11.2@5350,3259.45 ; U4.3@5438.49,3271.15 5437.49,3270.15 5397.15,3270.15 5386.94,3259.93 5350.49,3259.93 C11.2@5350,3259.45
NetC12_2: C12.2 R10.1 U3.5 | length 524.1
  Top Layer w9.84: C12.2 R10.1 5297.95,3729.52 5334.37,3765.94 5428.65,3765.94 5493.72,3831 5588,3831 5621,3864 U3.5
NetC16_1: C16.1 R14.2 | length 64
  Top Layer w9.84: C16.1 6633,3344.45 R14.2
NetJ2_11: J2.11 R1.2 | length 370.1
  Top Layer w9.84: v2(6479,4131) 6479,4070.48 R1.2
  Bottom Layer w9.84: J2.11 6317.47,4263.53 6336,4245 6435,4245 6479,4201 v2(6479,4131)
NetJ3_1: J3.1 U2.3 | length 378.2
  Top Layer w9.84: J3.1 5044.89,4154.81 5422.04,4154.81 U2.3
NetJ4_2: J4.2 U6.14 | length 410.2
  Top Layer w9.84: U6.14 6717,3525 6759.5,3567.5 J4.2
NetJ5_1: J5.1 U4.1 U4.2 | length 563
  Top Layer w9.84: U4.2 U4.1
  Top Layer w11.81: J5.1 5323.85,3552.15 5438,3438 5438,3371.64 U4.1
NetJ6_1: J6.1 R1.1 | length 1979.6
  Top Layer w9.84: J6.1 5046.07,3341 v2(5239,3341) ; v2(6480,3949) R1.1
  Bottom Layer w9.84: v2(5239,3341) 6275,3341 6480,3546 v2(6480,3949)
NetP1_2: P1.2 U6.11 | length 4128
  Top Layer w9.84: P1.2 5060.66,4746.66 5151,4837 6680,4837 6840,4677 6840,3270 6792,3222 6402,3222 6372,3252 6372,3346 6401,3375 U6.11
NetR2_1: R2.1 R5.2 R7.2 | length 136.7
  Top Layer w9.84: R7.2 5517.48,3501 5537,3501 5545.52,3509.52 R5.2 R2.1
NetR12_2: R12.2 U6.13 | length 211.6
  Top Layer w9.84: U6.13 6534,3475 6551,3458 R12.2
NetU4_6: U4.6 U4.7 | length 50
  Top Layer w9.84: U4.6 U4.7
PLLCTRL: C16.2 R12.1 U6.9 | length 167.6
  Top Layer w9.84: U6.9@6464.52,3275.52 R12.1 ; R12.1@6551.52,3276.04 6630.51,3276.04 C16.2
PLLDIV64: U5.4 U6.3 | length 716.7
  Top Layer w9.84: v2(5726,3566) 5726,3500 5750,3476 5798.23,3476 U5.4 ; v2(6192,3566) 6192,3531 6198,3525 U6.3@6255.63,3525
  Bottom Layer w9.84: v2(5726,3566) v2(6192,3566)
PWMOUT: J2.10 R9.1 | length 2153.7
  Top Layer w9.84: v2(5291,3390) 5346.52,3390 R9.1 ; v2(6216,4221) 6216,4221.74 6216.74,4222.47 6216.74,4313.52 J2.10
  Bottom Layer w9.84: v2(5291,3390) 6262,3390 6396,3524 6396,4156 6331,4221 v2(6216,4221)
TOADC: C8.2 C9.2 J2.2 J5.2 U3.6 U3.7 | length 1791.9
  Top Layer w9.84: J2.2 5417.47,4257.47 5402,4242 5003,4242 4964,4203 4964,3771 4988.26,3746.74 5042.24,3746.74 J5.2 5192,3749 5225,3782 5225,3907 5256.45,3938.45 C8.2 C9.2 5399.38,3924.07 5423.47,3924.07 5450.53,3897 5514,3897 5520.92,3903.92 5520.92,3941.29 U3.7 U3.6
TRIGGER: J1.14 R11.1 R13.2 | length 2349.9
  Top Layer w9.84: R11.1 6084.52,3401 R13.2 6086,3469.48 v2(6086,3525)
  Bottom Layer w9.84: J1.14 5317.47,4835.47 5254,4772 5254,3564.2 5293.2,3525 v2(6086,3525)
VCOCLK: R11.2 U5.11 U6.4 | length 408
  Top Layer w9.84: U5.11 6056.94,3375 6072.39,3359.55 6072.39,3346.35 6083.21,3335.52 R11.2 6118.52,3335.52 6125,3342 6125,3412 6137,3424 6198,3424 6205,3431 6205,3463 6217,3475 U6.4
VINA+: R3.2 R5.1 U3.3 | length 165
  Top Layer w9.84: U3.3 5571,3650.48 R3.2 5570.52,3611.48 5577,3605 R5.1
VINA-: R4.1 R6.2 U3.2 | length 166.3
  Top Layer w9.84: R6.2 R4.1 5514,3650.52 5514,3688 5521,3695 U3.2
VNEG: C3.2 C5.2 U1.5 U2.4 | length 1041.1
  Top Layer w15.75: U2.4 5356.61,4129.61 C5.2 5360.5,4128 5366.98,4121.52 5366.98,4116.02 5407,4076 5623,4076 5744.45,3954.55 C3.2@6144.9,3954.55 ; U1.5@6060,3985.06 6063,3988.06 U1.5 6111.41,3989 6129.94,3970.47 6129.94,3969.51 C3.2@6144.9,3954.55 ; C3.2 C3.2@6144.9,3954.55
pads on no net: J1.2 J1.3 J1.4 J1.5 J1.6 J1.7 J1.8 J1.9 J1.10 J1.11 J1.12 J1.13 J2.1 J2.3 J2.4 J2.5 J2.9 P1.3 U1.1 U1.7 U5.1 U5.2 U5.3 U5.5 U5.6 U5.7 U5.9 U5.10 U5.13 U5.14 U5.15 U6.1 U6.2 U6.10 U6.12 U6.15

## Polygon pours and split planes (outlines as drawn)
GND on Bottom Layer "BOTTOM" (solid, pour order 0): 4793,5233 6998,5233 6998,3010 4793,3010
GND on Top Layer "TOP" (solid, pour order 1): 4793,5233 6998,5233 6998,3010 4793,3010

## Keep-outs
Keep-Out Layer:
  the board outline again, w10

## Other copper
Top Layer:
  region net 5V: 6478,3701 6537,3701 6538,3749
  region net 5V: 6481,3677 6488,3670 6536,3661 6536,3677

## Silkscreen, mask and mechanical layers (free items; w line width, h text height)
Top Overlay:
  drawing of 11 lines, arcs and shapes, not listed
  text "VCG" at 5927,4576 h55.12
  text "IN" at 4862,4124 h40 r90
  text "GND" at 4862,3904.26 h40 r90
  text "GND" at 6974,3808.11 h40 r90
  text "LOCK-IN AMPLIFIER" at 5677,3772 h59.06
  text "ADC" at 4862,3695.68 h40 r90
  text "EXTREF" at 6974,3551.28 h40 r90
  text "OUT" at 4862,3498.83 h40 r90
  text "INTREF" at 4862,3229.46 h40 r90
  text "GND" at 4862,3089.26 h40 r90
Board Shape:
  lines w10: 4793,3010 6998,3010 ; 4793,3010 4793,5233 ; 4793,3010 4793,5233 ; 4793,3010 6998,3010 ; 4793,5233 6998,5233 ; 4793,5233 6998,5233 ; 6998,3010 6998,5233 ; 6998,3010 6998,5233